# Altium PCB PCB-PDB.PcbDoc
Units mm, origin at the board's own origin, x right, y up, seen from the top; angles counter-clockwise.
Board outline 66 x 79 mm, 2 copper layers (Top Layer, Bottom Layer); 132 components, 46 nets, 320 pads, 68 vias.
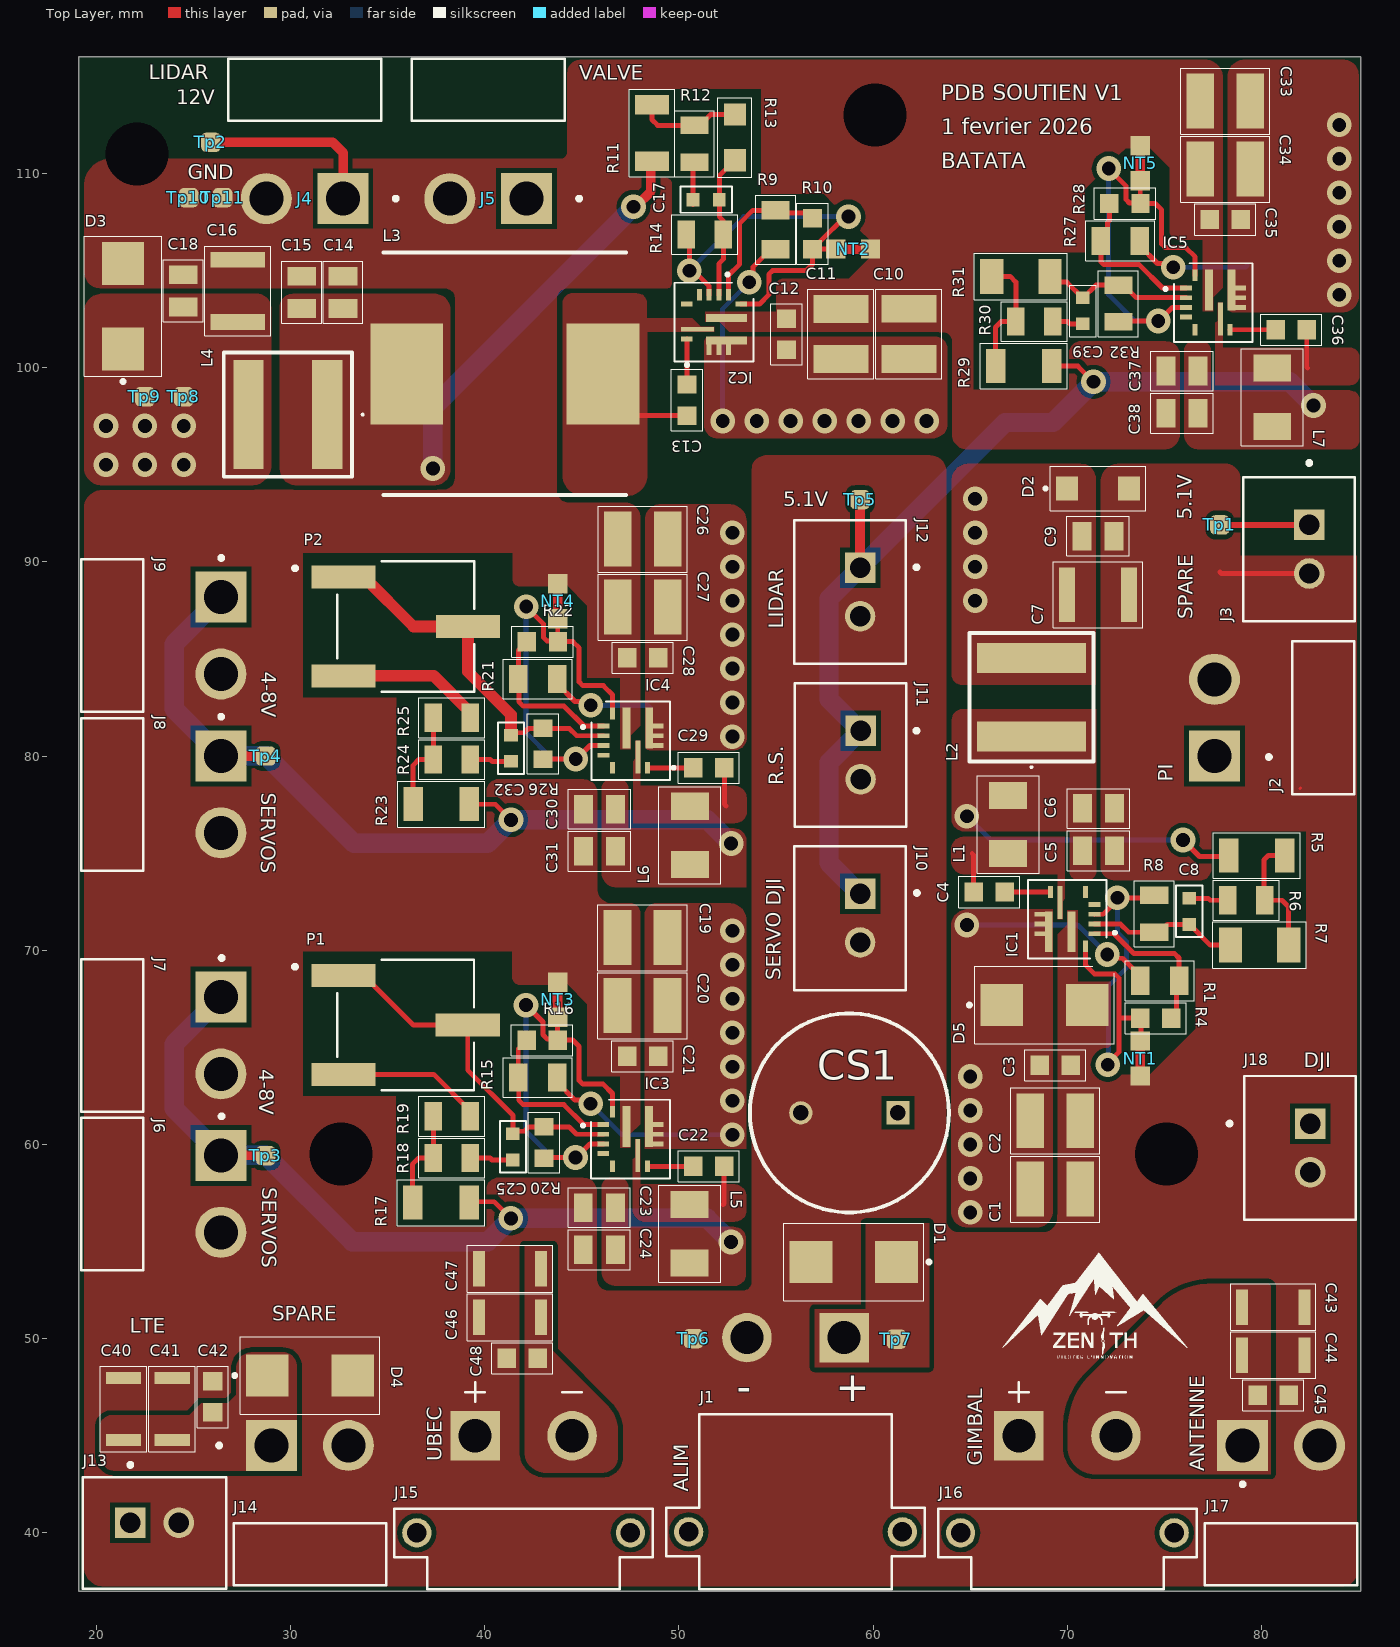
[diagram p0: Top Layer view]
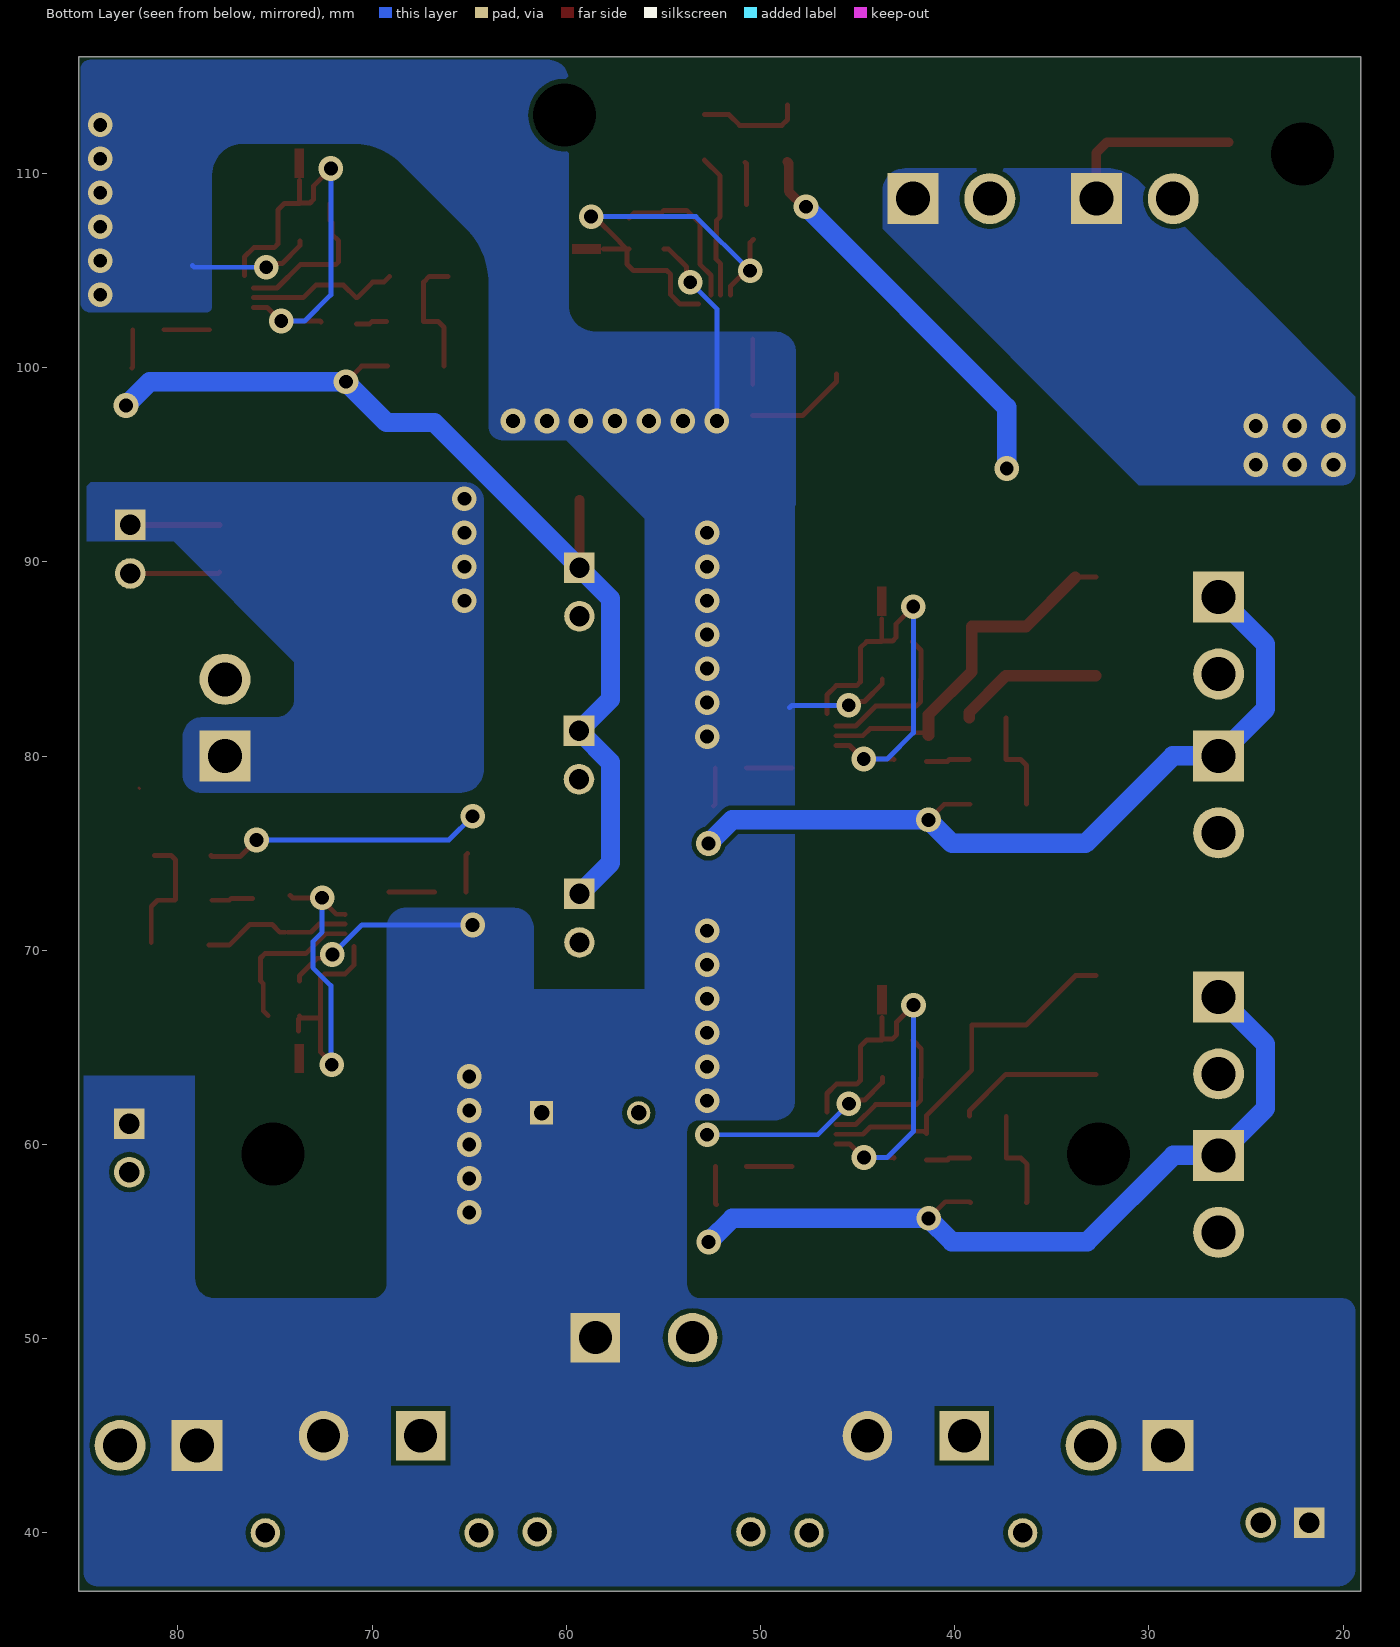
[diagram p1: Bottom Layer view, seen from below]
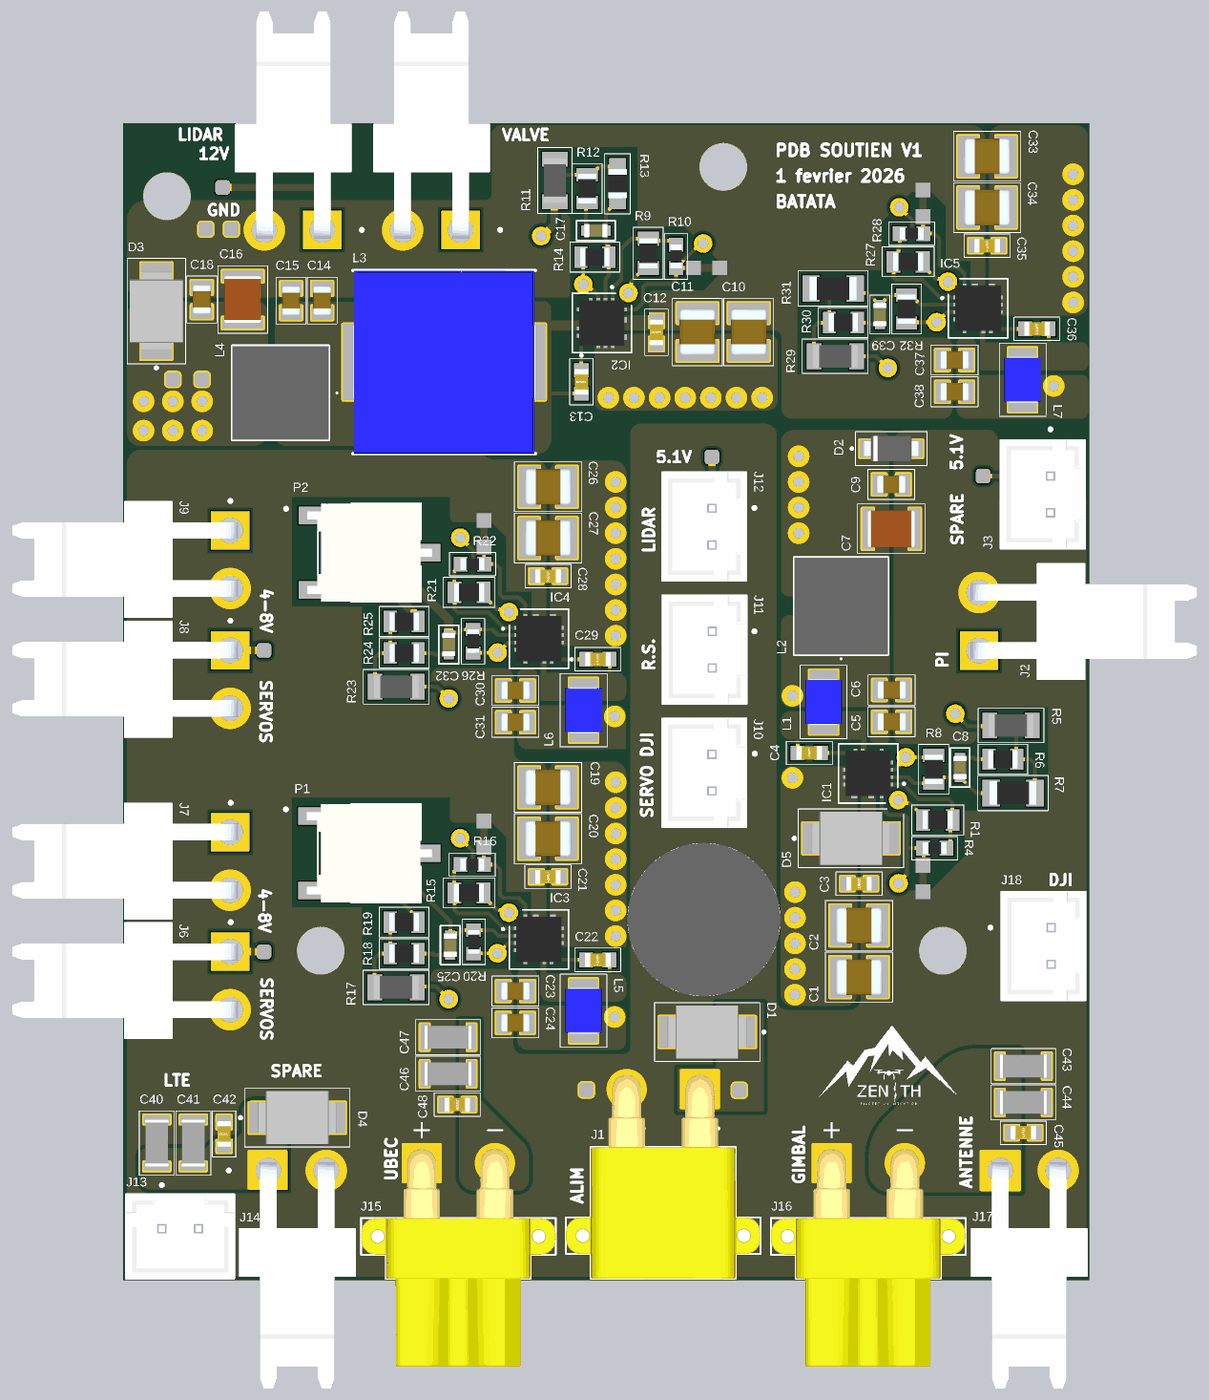
[diagram p2: 3D render of the assembled board from above, using the file's embedded part models]

## Layer stack, top to bottom
Top Solder: solder mask 0.0102, Solder Resist, Dk 3.5
Top Layer: signal copper 0.0356
Dielectric 1: dielectric 0.32, FR-4, Dk 4.8
Bottom Layer: signal copper 0.0356
Bottom Solder: solder mask 0.0102, Solder Resist, Dk 3.5

## Board outline
19.1,37 19.1,116 85.1,116 85.1,37

## Design rules (kind name [scope] priority, off if disabled: settings)
Clearance [All] p1: gap=0.244 ignorepadtopadclearanceinfootprint=TRUE except(0.254: SMDPad-THPad THPad-Via Via-Via)
PolygonConnect [All] p1: connectstyle=Direct reliefconductorwidth=0.254 reliefentries=4 polygonreliefangle="90 Angle" airgapwidth=0.254
RoutingVias [All] p1: holewidth=0.711 width=1.27 viastyle="Through Hole" minholewidth=0.711 minwidth=1.27 maxholewidth=0.711 maxwidth=1.27
SolderMaskExpansion [All] p1: expansion=0.102 istentingtop=FALSE
SupplyNets "Schematic Supply Nets_1" [InNet('PGND')] p1: voltage=0.000
SupplyNets "Schematic Supply Nets" [InNet('VCC')] p2: voltage=0.000
Width [All] p1: maxlimit=4 minlimit=0.15 preferedwidth=0.254 minimp=50.000000 maximp=50.000000 favimp=50.000000
30 further rules are at their usual default settings.

## Components (designator, comment, footprint, x,y, rotation, side; value= is the part's Value field where it differs from the comment)
C1 "10uF" CAPC3225X280N 69.375,57.7 r180 top
C2 "10uF" CAPC3225X280N 69.375,61.225 r180 top
C3 "0.1uF" C0603 69.375,64.075 r180 top
C4 "0.1uF" C0603 65.975,73 r180 top
C5 "22uF" CAPC2012X145N 71.6,75.125 r180 top
C6 "22uF" CAPC2012X145N 71.6,77.3 r180 top
C7 "1.5uF" CAPC3225X200N 71.575,88.3 r180 top
C8 "100pF" GRM1885C1H101JA01D 76.275,72 r270 top
C9 "22uF" CAPC2012X145N 71.575,91.325 r180 top
C10 "10uF" CAPC3225X280N 61.837,101.735 r270 top
C11 "10uF" CAPC3225X280N 58.336,101.731 r270 top
C12 "0.1uF" C0603 55.538,101.71 r270 top
C13 "0.1uF" C0603 50.411,98.331 r270 top
C14 "22uF" CAPC2012X145N 32.7,103.875 r270 top
C15 "22uF" CAPC2012X145N 30.575,103.875 r270 top
C16 "1.5uF" CAPC3225X200N 27.275,103.95 r270 top
C17 "100pF" GRM1885C1H101JA01D 51.4,108.65 r0 top
C18 "22uF" CAPC2012X145N 24.475,103.95 r270 top
C19 "10uF" CAPC3225X280N 48.125,70.65 r0 top
C20 "10uF" CAPC3225X280N 48.125,67.15 r0 top
C21 "0.1uF" C0603 48.125,64.55 r0 top
C22 "0.1uF" C0603 51.525,58.875 r0 top
C23 "22uF" CAPC2012X145N 45.9,56.75 r0 top
C24 "22uF" CAPC2012X145N 45.9,54.575 r0 top
C25 "100pF" GRM1885C1H101JA01D 41.45,59.875 r90 top
C26 "10uF" CAPC3225X280N 48.133,91.169 r0 top
C27 "10uF" CAPC3225X280N 48.133,87.669 r0 top
C28 "0.1uF" C0603 48.133,85.069 r0 top
C29 "0.1uF" C0603 51.533,79.394 r0 top
C30 "22uF" CAPC2012X145N 45.908,77.269 r0 top
C31 "22uF" CAPC2012X145N 45.908,75.094 r0 top
C32 "100pF" GRM1885C1H101JA01D 41.35,80.4 r90 top
C33 "10uF" CAPC3225X280N 78.125,113.725 r0 top
C34 "10uF" CAPC3225X280N 78.125,110.225 r0 top
C35 "0.1uF" C0603 78.125,107.625 r0 top
C36 "0.1uF" C0603 81.525,101.95 r0 top
C37 "22uF" CAPC2012X145N 75.9,99.825 r0 top
C38 "22uF" CAPC2012X145N 75.9,97.65 r0 top
C39 "100pF" GRM1885C1H101JA01D 70.8,102.925 r90 top
C40 "47uF 25V" CAPC3216X180N 21.4,46.375 r270 top
C41 "47uF 25V" CAPC3216X180N 23.9,46.375 r270 top
C42 "0.1uF" C0603 26,47 r270 top
C43 "47uF 25V" CAPC3216X180N 80.6,51.625 r180 top
C44 "47uF 25V" CAPC3216X180N 80.6,49.15 r180 top
C45 "0.1uF" C0603 80.6,47.075 r180 top
C46 "47uF 25V" CAPC3216X180N 41.3,51.1 r0 top
C47 "47uF 25V" CAPC3216X180N 41.3,53.6 r0 top
C48 "0.1uF" C0603 41.925,49 r0 top
CS1 "1000uF" CAPPRD500W60D1025H2150 61.275,61.625 r180 top
D1 "Diode" DIOM5436X244N 59,53.95 r180 top
D2 "SMF6.0A" SODFL3718X140N 71.575,93.775 r0 top
D3 "15V" DIOM5436X244N 21.375,103.158 r90 top
D4 "Diode" DIOM5436X244N 31,48.1 r0 top
D5 "Diode" DIOM5436X244N 68.825,67.175 r0 top
IC1 "TPS56637RPAR" TPS56637RPAR 69.995,71.6 r180 top
IC2 "TPS56637RPAR" TPS56637RPAR 51.802,102.345 r270 top
IC3 "TPS56637RPAR" TPS56637RPAR 47.505,60.275 r0 top
IC4 "TPS56637RPAR" TPS56637RPAR 47.513,80.794 r0 top
IC5 "TPS56637RPAR" TPS56637RPAR 77.505,103.35 r0 top
J1 "XT30PW-M" AMASS_XT30PW-M 56,40.05 r180 top
J2 "B2PS-VH_(LF)(SN)" JST_B2PS-VH_(LF)(SN) 77.575,81.97 r90 top
J3 "B2B-XH-A_(LF)(SN)" JST_B2B-XH-A_(LF)(SN) 81.925,90.65 r90 top
J4 "B2PS-VH_(LF)(SN)" JST_B2PS-VH_(LF)(SN) 30.73,108.701 r180 top
J5 "B2PS-VH_(LF)(SN)" JST_B2PS-VH_(LF)(SN) 40.178,108.701 r180 top
J6 "B2PS-VH_(LF)(SN)" JST_B2PS-VH_(LF)(SN) 26.416,57.456 r270 top
J7 "B2PS-VH_(LF)(SN)" JST_B2PS-VH_(LF)(SN) 26.416,65.61 r270 top
J8 "B2PS-VH_(LF)(SN)" JST_B2PS-VH_(LF)(SN) 26.416,78.026 r270 top
J9 "B2PS-VH_(LF)(SN)" JST_B2PS-VH_(LF)(SN) 26.416,86.205 r270 top
J10 "B2B-XH-A_(LF)(SN)" JST_B2B-XH-A_(LF)(SN) 58.8,71.65 r90 top
J11 "B2B-XH-A_(LF)(SN)" JST_B2B-XH-A_(LF)(SN) 58.825,80.05 r90 top
J12 "B2B-XH-A_(LF)(SN)" JST_B2B-XH-A_(LF)(SN) 58.8,88.45 r90 top
J13 "B2B-XH-A_(LF)(SN)" JST_B2B-XH-A_(LF)(SN) 23,40 r180 top
J14 "B2PS-VH_(LF)(SN)" JST_B2PS-VH_(LF)(SN) 31,44.5 r0 top
J15 "XT30PW-F" AMASS_XT30PW-F 42,40 r180 top
J16 "XT30PW-F" AMASS_XT30PW-F 70,40 r180 top
J17 "B2PS-VH_(LF)(SN)" JST_B2PS-VH_(LF)(SN) 81,44.5 r0 top
J18 "B2B-XH-A_(LF)(SN)" JST_B2B-XH-A_(LF)(SN) 81.975,59.825 r90 top
L1 "3.3uH" INDM3225X240N 66.95,76.475 r270 top
L2 "6.8uH" ASPIF60606R8MT 68.15,83.025 r90 top
L3 "5.6uH" INDPM125125X800N 41.036,99.681 r0 top
L4 "6.8uH" ASPIF60606R8MT 29.861,97.581 r180 top
L5 "3.3uH" INDM3225X240N 50.55,55.4 r90 top
L6 "3.3uH" INDM3225X240N 50.558,75.919 r90 top
L7 "3.3uH" INDM3225X240N 80.55,98.475 r90 top
NT1 "NetTie" NetTie 73.75,64.425 r270 top net-tie
NT2 "NetTie" NetTie 58.961,106.106 r0 top net-tie
NT3 "NetTie" NetTie 43.75,67.45 r90 top net-tie
NT4 "NetTie" NetTie 43.758,87.969 r90 top net-tie
NT5 "NetTie" NetTie 73.75,110.525 r90 top net-tie
P1 "50k" TRIM_3361P-1-503GLF 35.925,66.15 r0 top
P2 "50k" TRIM_3361P-1-503GLF 35.933,86.669 r0 top
R1 "169k" RESC2012X50N 74.75,68.425 r180 top
R4 "36.1k" RESC1608X51N 74.55,66.5 r0 top
R5 "49.9" RESC3016X65N 79.75,74.875 r180 top
R6 "20k" RESC2012X60N 79.2,72.575 r180 top
R7 "75k" RESC3216X75N 79.896,70.261 r0 top
R8 "10k" RESC2012X60N 74.475,71.875 r270 top
R9 "169k" RESC2012X50N 54.977,107.1 r270 top
R10 "36.1k" RESC1608X51N 56.875,106.9 r90 top
R11 "49.9" RESC3016X65N 48.602,112.075 r270 top
R12 "20k" RESC2012X60N 50.802,111.525 r270 top
R13 "191k" ERJ6ENF1000V 52.886,111.856 r90 top
R14 "10k" RESC2012X60N 51.325,106.85 r0 top
R15 "169k" RESC2012X50N 42.725,63.45 r0 top
R16 "36.1k" RESC1608X51N 42.95,65.375 r180 top
R17 "49.9" RESC3016X65N 37.75,57 r0 top
R18 "20k" RESC2012X60N 38.3,59.3 r0 top
R19 "42.7k" RESC2012X60N 38.3,61.45 r180 top
R20 "7.5k" RESC1608X55N 43.05,60.1 r90 top
R21 "169k" RESC2012X50N 42.733,83.969 r0 top
R22 "36.1k" RESC1608X51N 42.971,85.894 r180 top
R23 "49.9" RESC3016X65N 37.758,77.519 r0 top
R24 "20k" RESC2012X60N 38.308,79.819 r0 top
R25 "42.7k" RESC2012X60N 38.308,81.969 r180 top
R26 "7.5k" RESC1608X55N 43,80.625 r90 top
R27 "169k" RESC2012X50N 72.725,106.525 r0 top
R28 "36.1k" RESC1608X51N 72.963,108.45 r180 top
R29 "49.9" RESC3016X65N 67.75,100.075 r0 top
R30 "20k" RESC2012X60N 68.3,102.375 r0 top
R31 "75k" RESC3216X75N 67.6,104.7 r180 top
R32 "10k" RESC2012X60N 72.625,103.3 r90 top
Tp1 "Testpoint" Testpoint 77.85,91.9 r90 top
Tp2 "Testpoint" Testpoint 25.9,111.6 r90 top
Tp3 "Testpoint" Testpoint 28.725,59.425 r90 top
Tp4 "Testpoint" Testpoint 28.725,80 r90 top
Tp5 "Testpoint" Testpoint 59.325,93.2 r0 top
Tp6 "Testpoint" Testpoint 50.75,50 r90 top
Tp7 "Testpoint" Testpoint 61.2,49.975 r90 top
Tp8 "Testpoint" Testpoint 24.5,98.5 r90 top
Tp9 "Testpoint" Testpoint 22.5,98.5 r90 top
Tp10 "Testpoint" Testpoint 24.75,108.75 r90 top
Tp11 "Testpoint" Testpoint 26.5,108.75 r90 top

## Footprints (in the part's own frame and the unit in brackets; to place one, negate y for a bottom-side part, rotate by r counter-clockwise, add the part's x,y. Pads: shape width x height; smd on the part's side, far side on the other; paste and mask are expansions set on the pad)
AMASS_XT30PW-F [mm]
  round 2.55 hole 1.7: N(-2.5,-5)
  rect 2.55x2.55 / inner round 2.55 / far side rect 2.55x2.55 hole 1.7: P(2.5,-5)
  round 1.508 hole 1: S1(5.5,0) S2(-5.5,0)
  silkscreen extent -6.65,-7.75 6.65,2.9, body extent -6.65,-6 6.65,8.9, height 5
AMASS_XT30PW-M [mm]
  round 2.55 hole 1.7: N(2.5,-10)
  rect 2.55x2.55 / inner round 2.55 / far side rect 2.55x2.55 hole 1.7: P(-2.5,-10)
  round 1.508 hole 1: S1(5.5,0) S2(-5.5,0)
  silkscreen extent -6.65,-6.05 6.65,2.95, body extent -6.65,-11 6.65,2.95, height 5
ASPIF60606R8MT [mm]
  rect 1.55x5.6 smd: 1(-2.025,0) 2(2.025,0)
  silkscreen extent -3.65,-3.2 3.3,3.2, body extent -3.3,-3.2 3.3,3.2, height 6.1
C0603 [mm]
  rect 0.95x1 smd: 1(-0.8,0) 2(0.8,0)
  silkscreen extent -1.58,-0.8 1.58,0.8, body extent -0.87,-0.48 0.88,0.47, height 0.87
CAPC2012X145N [mm]
  rect 0.97x1.47 smd: 1(-0.83,0) 2(0.83,0)
  silkscreen extent -1.6,-1.02 1.6,1.02, body extent -1,-0.63 1,0.63, height 1.45
CAPC3216X180N [mm]
  rect 0.62x1.82 smd: 1(-1.6,0) 2(1.6,0)
  silkscreen extent -2.2,-1.2 2.2,1.2, body extent -1.6,-0.8 1.6,0.8, height 1.6
CAPC3225X200N [mm]
  rect 0.81x2.82 smd: 1(-1.6,0) 2(1.6,0)
  silkscreen extent -2.3,-1.7 2.3,1.7, body extent -1.6,-1.25 1.6,1.25, height 2.5
CAPC3225X280N [mm]
  rect 1.43x2.82 smd: 1(-1.29,0) 2(1.29,0)
  silkscreen extent -2.3,-1.7 2.3,1.7, body extent -1.6,-1.25 1.6,1.25, height 2.8
CAPPRD500W60D1025H2150 [mm]
  rect 1.2x1.2 hole 0.8: 1(0,0)
  round 1.2 hole 0.8: 2(5,0)
  silkscreen extent -2.63,-5.12 7.63,5.12, body extent -2.75,-5.24 7.75,5.24, height 21.5
DIOM5436X244N [mm]
  rect 2.2x2.15 smd: 1(-2.2,0) 2(2.2,0)
  silkscreen extent -3.93,-2 3.6,2, body extent -2.7,-1.81 2.7,1.81, height 2.31
ERJ6ENF1000V [mm]
  rect 1.15x1.15 smd: 1(-1.175,0) 2(1.175,0)
  silkscreen extent -2.06,-0.86 2.04,0.89, body extent -1,-0.63 1,0.63, height 0.6
GRM1885C1H101JA01D [mm]
  rect 0.65x0.7 smd: 1(-0.675,0) 2(0.675,0)
  silkscreen extent -1.33,-0.67 1.33,0.67, body extent -0.8,-0.45 0.8,0.45, height 0.8
INDM3225X240N [mm]
  rect 1.4x1.95 smd: 1(-1.5,0) 2(1.5,0)
  silkscreen extent -2.5,-1.6 2.5,1.6, body extent -1.6,-1.25 1.6,1.25, height 2.4
INDPM125125X800N [mm]
  rect 3.75x5.2 smd: 1(-5.05,0) 2(5.05,0)
  silkscreen extent -6.25,-6.25 6.25,6.25, body extent -6.25,-6.25 6.25,6.25, height 8
JST_B2B-XH-A_(LF)(SN) [mm]
  rect 1.575x1.575 / inner round 1.575 / far side rect 1.575x1.575 hole 1.05: 1(1.25,-0.525)
  round 1.575 hole 1.05: 2(-1.25,-0.525)
  silkscreen extent -3.7,-2.88 4.54,2.88, body extent -3.7,-2.88 3.7,2.88, height 7
JST_B2PS-VH_(LF)(SN) [mm]
  rect 2.625x2.625 / inner round 2.625 / far side rect 2.625x2.625 hole 1.75: 1(-1.98,0)
  round 2.625 hole 1.75: 2(1.98,0)
  silkscreen extent -3.93,-7.2 3.93,-2.7, body extent -3.93,-14.9 3.93,0.57, height 8.5
NetTie [mm]
  rect 1x1 smd mask-10: 1(-0.9,0) 2(0.9,0)
  Top Layer region: -0.75,-0.249 0.75,-0.249 0.75,0.251 -0.75,0.251
RESC1608X51N [mm]
  rect 0.95x1 smd: 1(-0.8,0) 2(0.8,0)
  silkscreen extent -1.58,-0.8 1.58,0.8, body extent -0.81,-0.41 0.81,0.41, height 0.51
RESC1608X55N [mm]
  rect 0.9x1 smd: 1(-0.8,0) 2(0.8,0)
  silkscreen extent -1.55,-0.8 1.55,0.8, body extent -0.8,-0.4 0.8,0.4, height 0.45
RESC2012X50N [mm]
  rect 0.95x1.45 smd: 1(-1,0) 2(1,0)
  silkscreen extent -1.78,-1.02 1.78,1.02, body extent -1.02,-0.63 1.02,0.63, height 0.5
RESC2012X60N [mm]
  rect 0.9x1.45 smd: 1(-0.95,0) 2(0.95,0)
  silkscreen extent -1.7,-1.02 1.7,1.02, body extent -1,-0.63 1,0.63, height 0.6
RESC3016X65N [mm]
  rect 1x1.75 smd: 1(-1.45,0) 2(1.45,0)
  silkscreen extent -2.25,-1.17 2.25,1.17, body extent -1.52,-0.78 1.53,0.77, height 0.55
RESC3216X75N [mm]
  rect 1.2x1.8 smd: 1(-1.5,0) 2(1.5,0)
  silkscreen extent -2.4,-1.2 2.4,1.2, body extent -1.6,-0.8 1.6,0.8, height 0.75
SODFL3718X140N [mm]
  rect 1.12x1.22 smd: 1(-1.6,0) 2(1.6,0)
  silkscreen extent -2.72,-1.15 2.45,1.15, body extent -1.85,-0.9 1.85,0.9, height 1.4
Testpoint [mm]
  rrect50% 1x1 smd: TP(0,0)
TPS56637RPAR [mm]
  rect 0.6x0.25 smd mask+0: 1(-1.4,0.75) 2(-1.4,0.25) 3(-1.4,-0.25) 4(-1.4,-0.75)
  rect 0.25x0.6 smd mask+0: 5(-0.93,-1.4) 7(0.87,-1.4) 10(-0.93,1.4)
  rect 0.25x1.7 smd mask+0: 6(0.37,-0.85)
  rect 0.4x2.1 smd mask+0: 8(0.95,0.65) 9(-0.21,0.65)
  rect 0.56x0.25 smd mask+0: 11(1.42,-0.25) 12(1.42,0.25) 13(1.42,0.75)
  silkscreen extent -2.5,-2.02 2.02,2.02, body extent -1.55,-1.55 1.55,1.55, height 1
TRIM_3361P-1-503GLF [mm]
  rect 3.3x1.19 smd: 1(-3.2,2.54) 2(3.2,0) 3(-3.2,-2.54)
  silkscreen extent -5.8,-3.35 3.52,3.35, body extent -4.27,-3.35 4.27,3.35, height 5.84

## Part data
C1 C2 C10 C11 C19 C20 C26 C27 C33 C34: library part AGC1210X7R500-106KNE, "Capacitor", Manufacturer_Name=Venkel, Datasheet Link=https://data.venkel.com/documents/agc-series?force=1, Height=2.8mm, Manufacturer_Part_Number=AGC1210X7R500-106KNE
C3 C4 C12 C13 C21 C22 C28 C29 C35 C36 C42 C45 C48: library part C0603C104K5RACTU, "Capacitor", Manufacturer_Name=KEMET, Mouser Part Number=80-C0603C104K5R, Arrow Part Number=C0603C104K5RACTU, Arrow Price/Stock=https://www.arrow.com/en/products/c0603c104k5ractu/kemet-corporation?utm_currency=USD&region=nac, Datasheet Link=https://content.kemet.com/datasheets/KEM_C1002_X7R_SMD.pdf, Height=0.87mm, Manufacturer_Part_Number=C0603C104K5RACTU, Mouser Price/Stock=https://www.mouser.co.uk/ProductDetail/KEMET/C0603C104K5RACTU?qs=l5k%252BbMnNDkkVcnZPSAaaiQ%3D%3D
C5 C6 C9 C14 C15 C18 C23 C24 C30 C31 C37 C38: library part C2012X5R1V226M125AC, "Capacitor, 35V", Manufacturer_Name=TDK, Mouser Part Number=810-C2012X5R1V226MAC, Arrow Part Number=C2012X5R1V226M125AC, Arrow Price/Stock=https://www.arrow.com/en/products/c2012x5r1v226m125ac/tdk?utm_currency=USD&region=nac, Datasheet Link=https://product.tdk.com/info/en/catalog/datasheets/mlcc_commercial_midvoltage_en.pdf, Height=1.45mm, Manufacturer_Part_Number=C2012X5R1V226M125AC, Mouser Price/Stock=https://www.mouser.co.uk/ProductDetail/TDK/C2012X5R1V226M125AC?qs=6JAMGB%252BEdkyUk0d2Mu2IrQ%3D%3D
C7 C16: library part C3225X7R2A155K200AB, "Capacitor", Manufacturer_Name=TDK, Mouser Part Number=810-C3225X7R2A155K2B, Arrow Part Number=C3225X7R2A155K200AB, Arrow Price/Stock=https://www.arrow.com/en/products/c3225x7r2a155k200ab/tdk, Datasheet Link=https://product.tdk.com/info/en/catalog/datasheets/mlcc_commercial_midvoltage_en.pdf, Height=2mm, Manufacturer_Part_Number=C3225X7R2A155K200AB, Mouser Price/Stock=https://www.mouser.co.uk/ProductDetail/TDK/C3225X7R2A155K200AB?qs=xLDY6iXSiQYhBLhobQfC5A%3D%3D
C8 C17 C25 C32 C39: library part GRM1885C1H101JA01D, "Capacitor", Manufacturer_Name="Murata Electronics", Mouser Part Number=81-GRM39C101J50, Arrow Part Number=GRM1885C1H101JA01D, Arrow Price/Stock=https://www.arrow.com/en/products/grm1885c1h101ja01d/murata-manufacturing?utm_currency=USD&region=europe, Datasheet Link=https://search.murata.co.jp/Ceramy/image/img/A01X/G101/ENG/GRM1885C1H101JA01-01A.pdf, Height=0.9mm, Manufacturer_Part_Number=GRM1885C1H101JA01D, Mouser Price/Stock=https://www.mouser.co.uk/ProductDetail/Murata-Electronics/GRM1885C1H101JA01D?qs=H3lwsW1hsDt1I4guwPQ00A%3D%3D
C40 C41 C43 C44 C46 C47: library part C3216X5R1E476M160AC, "Capacitor 47 uF", Manufacturer_Name=TDK, Manufacturer_Part_Number=C3216X5R1E476M160AC., Mouser Part Number=N/A, Datasheet Link=https://media.digikey.com/pdf/Data%20Sheets/TDK%20PDFs/mlcc_commercial_general_Rev2018.pdf, Height=1.8mm, Mouser Price/Stock=https://www.mouser.com/Search/Refine.aspx?Keyword=N%2FA
CS1: library part 35PX1000MEFC10X20, "Capacitor Polarised", Manufacturer_Name=Rubycon, Mouser Part Number=232-35PX1000MEFC10X2, Arrow Part Number=35PX1000MEFC10X20, Arrow Price/Stock=https://www.arrow.com/en/products/35px1000mefc10x20/rubycon?region=nac, Datasheet Link=https://www.rubycon.co.jp/wp-content/uploads/catalog-aluminum/PX.pdf, Height=21.5mm, Manufacturer_Part_Number=35PX1000MEFC10X20, Mouser Price/Stock=https://www.mouser.co.uk/ProductDetail/Rubycon/35PX1000MEFC10X20?qs=T3oQrply3y86%2F1qnNfO%252BAA%3D%3D
D1 D4 D5: library part SMBJ26A, "TVS Diode (Uni-directional)", Manufacturer_Name=Bourns, Mouser Part Number=652-SMBJ26A, Arrow Part Number=SMBJ26A, Arrow Price/Stock=https://www.arrow.com/en/products/smbj26a/bourns?utm_currency=USD&region=nac, Datasheet Link=https://www.bourns.com/docs/product-datasheets/smbj.pdf?sfvrsn=34552159_17, Height=2.44mm, Manufacturer_Part_Number=SMBJ26A, Mouser Price/Stock=https://www.mouser.co.uk/ProductDetail/Bourns/SMBJ26A?qs=%252Bf8Cd6aE5bzyuNXx4QjGJA%3D%3D
D2: "TVS Diode (Uni-directional)", Manufacturer_Name=Diotec, Mouser Part Number=637-SMF6.0A, Arrow Part Number=SMF6.0A, Arrow Price/Stock=https://www.arrow.com/en/products/smf6.0a/diotec-semiconductor-ag?utm_currency=USD&region=nac, Datasheet Link=https://www.mouser.cn/ProductDetail/Diotec-Semiconductor/SMF6.0A?qs=OlC7AqGiEDnWjoz6bXl5LA%3D%3D, Height=1.4mm, Manufacturer_Part_Number=SMF6.0A, Mouser Price/Stock=https://www.mouser.co.uk/ProductDetail/Diotec-Semiconductor/SMF6.0A?qs=OlC7AqGiEDnWjoz6bXl5LA%3D%3D
D3: library part SMBJ15A, "TVS Diode (Uni-directional)", Manufacturer_Name=Vishay, Mouser Part Number=78-SMBJ15A, Datasheet Link=http://www.vishay.com/docs/88392/smbj.pdf, Height=2.44mm, Manufacturer_Part_Number=SMBJ15A, Mouser Price/Stock=https://www.mouser.co.uk/ProductDetail/Vishay-General-Semiconductor/SMBJ15A?qs=%252BA9HMDDz5KavBY56EO7ceQ%3D%3D
IC1 IC2 IC3 IC4 IC5: "Integrated Circuit", Manufacturer_Name="Texas Instruments", Mouser Part Number=595-TPS56637RPAR, Arrow Part Number=TPS56637RPAR, Arrow Price/Stock=https://www.arrow.com/en/products/tps56637rpar/texas-instruments?utm_currency=USD&region=nac, Datasheet Link=https://www.ti.com/lit/gpn/TPS56637, Height=1mm, Manufacturer_Part_Number=TPS56637RPAR, Mouser Price/Stock=https://www.mouser.co.uk/ProductDetail/Texas-Instruments/TPS56637RPAR?qs=9r4v7xj2LnkQ0Y9HL0qmSA%3D%3D
J1: "Socket; DC supply; XT30; male; PIN: 2; on PCBs; THT; Colour: yellow", Package=None, Check_prices=https://www.snapeda.com/parts/XT30PW-M/AMASS/view-part/?ref=eda, MF=AMASS, MP=XT30PW-M, SnapEDA_Link=https://www.snapeda.com/parts/XT30PW-M/AMASS/view-part/?ref=snap
J2 J4 J5 J6 J7 J8 J9 J14 J17: "Connector Header Through Hole, Right Angle 2 position 0.156 (3.96mm)", Package=None, Check_prices=https://www.snapeda.com/parts/B2PS-VH%20(LF)(SN)/JST/view-part/?ref=eda, MF=JST, MP="B2PS-VH (LF)(SN)", SnapEDA_Link=https://www.snapeda.com/parts/B2PS-VH%20(LF)(SN)/JST/view-part/?ref=snap
J3 J10 J11 J12 J13 J18: "Connector Header Through Hole 2 position 0.098 (2.50mm)", Package=None, Check_prices=https://www.snapeda.com/parts/B2B-XH-A%20(LF)(SN)/JST+Sales+America+Inc./view-part/?ref=eda, MF="JST Sales", MP="B2B-XH-A (LF)(SN)", SnapEDA_Link=https://www.snapeda.com/parts/B2B-XH-A%20(LF)(SN)/JST+Sales+America+Inc./view-part/?ref=snap
J15 J16: "Socket; DC supply; XT30; female; PIN: 2; on PCBs; THT; yellow; 15A", Package=None, Check_prices=https://www.snapeda.com/parts/XT30PW-F/AMASS/view-part/?ref=eda, MF=amass, MP=XT30PW-F, SnapEDA_Link=https://www.snapeda.com/parts/XT30PW-F/AMASS/view-part/?ref=snap
L1 L5 L6 L7: library part NLV32T-3R3J-EF, "Inductor", Manufacturer_Name=TDK, Datasheet Link=https://product.tdk.com/system/files/dam/doc/product/inductor/inductor/smd/catalog/inductor_commercial_standard_nlv32-ef_en.pdf, Height=2.4mm, Manufacturer_Part_Number=NLV32T-3R3J-EF
L2 L4: library part ASPI-F6060-6R8M-T, "Inductor", Manufacturer_Name=ABRACON, Datasheet Link=https://abracon.com/datasheets/ASPI-F6060.pdf, Height=6mm, Manufacturer_Part_Number=ASPI-F6060-6R8M-T
L3: library part SRR1280-5R6Y, "Inductor", Manufacturer_Name=Bourns, Mouser Part Number=652-SRR1280-5R6Y, Datasheet Link=https://docs.rs-online.com/c0b9/0900766b80ddd400.pdf, Height=8mm, Manufacturer_Part_Number=SRR1280-5R6Y, Mouser Price/Stock=https://www.mouser.co.uk/ProductDetail/Bourns/SRR1280-5R6Y?qs=brMhP%2FMjUffYaqEo5zomkw%3D%3D
NT1 NT2 NT3 NT4 NT5: "Net Tie"
P1 P2: library part TRIM_3361P-1-503GLF, "Potentiometer 50k ohms", ComponentLink1Description="Manufacturer Link", ComponentLink1URL=https://www.digikey.ca/en/products/detail/bourns-inc/3361P-1-503GLF/1088375
R1 R9 R15 R21 R27: library part CRCW08051K96FKEA, "Resistor", Manufacturer_Name=Vishay, Mouser Part Number=71-CRCW08051K96FKEA, Arrow Part Number=CRCW08051K96FKEA, Arrow Price/Stock=https://www.arrow.com/en/products/crcw08051k96fkea/vishay?region=nac, Datasheet Link=http://www.vishay.com/docs/20035/dcrcwe3.pdf, Height=0.5mm, Manufacturer_Part_Number=CRCW08051K96FKEA, Mouser Price/Stock=https://www.mouser.co.uk/ProductDetail/Vishay-Dale/CRCW08051K96FKEA?qs=1CkV0QOCgMpA%2F6GTgXIN%2Fg%3D%3D
R4 R10 R16 R22 R28: library part PTN0603E3612BST1, "Resistor", Manufacturer_Name=Vishay, Datasheet Link=http://www.vishay.com/docs/60026/ptn.pdf, Height=0.508mm, Manufacturer_Part_Number=PTN0603E3612BST1
R5 R11 R17 R23 R29: library part RNCF1206TKY49R9, "Resistor", Manufacturer_Name="Stackpole Electronics", Mouser Part Number=708-RNCF1206TKY49R9, Arrow Part Number=RNCF1206TKY49R9, Arrow Price/Stock=https://www.arrow.com/en/products/rncf1206tky49r9/stackpole-electronics?region=nac, Datasheet Link=https://www.seielect.com/catalog/sei-rncf.pdf, Height=0.65mm, Manufacturer_Part_Number=RNCF1206TKY49R9, Mouser Price/Stock=https://www.mouser.co.uk/ProductDetail/SEI-Stackpole/RNCF1206TKY49R9?qs=IPgv5n7u5QbrkyDMq71eTQ%3D%3D
R6 R12 R18 R24 R30: library part RK73H2ATTD2002F, "Resistor", Manufacturer_Name="KOA Speer", Mouser Part Number=660-RK73H2ATTD2002F, Datasheet Link=http://www.koaspeer.com/catimages/Products/RK73H/RK73H.pdf, Height=0.6mm, Manufacturer_Part_Number=RK73H2ATTD2002F, Mouser Price/Stock=https://www.mouser.com/Search/Refine.aspx?Keyword=660-RK73H2ATTD2002F
R7 R31: library part CR1206-FX-7502ELF, "Resistor", Manufacturer_Name=Bourns, Mouser Part Number=652-CR1206FX-7502ELF, Datasheet Link=http://www.bourns.com/data/global/pdfs/CHPREZTR.pdf, Height=0.75mm, Manufacturer_Part_Number=CR1206-FX-7502ELF, Mouser Price/Stock=https://www.mouser.co.uk/ProductDetail/Bourns/CR1206-FX-7502ELF?qs=x5wsLs3ZZ83CFlrcVX0CWw%3D%3D
R8 R14 R32: library part CRCW080510K0FKEAHP, "Resistor", Manufacturer_Name=Vishay, Mouser Part Number=71-CRCW080510K0FKEAH, Arrow Part Number=CRCW080510K0FKEAHP, Arrow Price/Stock=https://www.arrow.com/en/products/crcw080510k0fkeahp/vishay?utm_currency=USD&region=europe, ClassName=PowerModul, Datasheet Link=https://componentsearchengine.com/Datasheets/1/CRCW08051R00FKEAHP.pdf, Height=0.6mm, Manufacturer_Part_Number=CRCW080510K0FKEAHP, Mouser Price/Stock=https://www.mouser.co.uk/ProductDetail/Vishay-Dale/CRCW080510K0FKEAHP?qs=FlFvgi4rxBybVOW6oiRQjA%3D%3D
R13: library part ERJ-6ENF1913V, "Resistor", Manufacturer_Name=Panasonic, Mouser Part Number=667-ERJ-6ENF1913V, Arrow Part Number=ERJ-6ENF1913V, Arrow Price/Stock=https://www.arrow.com/en/products/erj-6enf1913v/panasonic, Datasheet Link=https://industrial.panasonic.com/cdbs/www-data/pdf/RDA0000/AOA0000C84.pdf, Height=0.7mm, Manufacturer_Part_Number=ERJ-6ENF1913V, Mouser Price/Stock=https://www.mouser.com/Search/Refine.aspx?Keyword=667-ERJ-6ENF1913V
R19 R25: library part RN73R2ATTD4272D25, Package=None, Availability=Unavailable, MP=RN73R2ATTD4272D25, Price=None
R20 R26: library part RC0603FR-077K5L, "Resistor", Manufacturer_Name=KEMET, Mouser Part Number=603-RC0603FR-077K5L, Datasheet Link=http://www.yageo.com/documents/recent/PYu-RC0603_51_RoHS_L_v5.pdf, Height=0.55mm, Manufacturer_Part_Number=RC0603FR-077K5L, Mouser Price/Stock=https://www.mouser.co.uk/ProductDetail/Yageo/RC0603FR-077K5L/?qs=2cAdsCoAWREF%252BylA0TXaCQ%3D%3D

## Free pads (board coordinates)
  round 1.524 hole 3.25: 7(22.1,111) 7(32.6,59.5) 7(60.1,113) 7(75.1,59.5)

## Via types
v1: diameter 1.27, hole 0.711, Top Layer to Bottom Layer, 68 vias

## Nets (pads, with @x,y where several pads share a name; then routed paths per layer and width w, separated by ;. In a path a pad name is that pad's centre, name@x,y a point inside that pad or via, vN(x,y) a via of type N, cw(c..) or ccw(c..) an arc to the next point about the centre after c; other vN are vias at no path point)
AGND: IC1.3 IC1.10 NT1.1 R4.1 R8.1 | length 22
  Top Layer w0.254: IC1.10 70.925,69.25 71.404,68.771 72.455,68.771 72.65,68.576 72.65,66.475 ; IC1.3 71.397,71.852 71.847,71.852 72.575,72.58 v1(72.575,72.7) 74.1,72.7 R8.1@74.225,72.825 ; v1(72.075,64.1) 72.075,64.176 72.65,64.751 72.65,66.475 ; R4.1 73.8,66.45 73.8,65.85 ; R4.1@73.75,66.625 73.625,66.5 72.675,66.5 72.65,66.475
  Bottom Layer w0.254: v1(72.075,64.1) 72.125,64.15 72.125,68.175 73.054,69.104 73.054,70.446 72.575,70.925 v1(72.575,72.7)
AGND2: IC2.3 IC2.10 NT2.1 R10.1 R14.1 | length 22.5
  Top Layer w0.254: R14.1@50.361,106.608 50.536,106.433 v1(50.536,104.983) 50.763,104.983 51.55,104.197 51.55,103.747 IC2.3 ; IC2.10 54.152,103.275 54.631,103.754 54.631,104.805 54.826,105 56.55,105 56.875,105.325 R10.1 56.9,106.1 57.248,106.448 57.248,106.473 58.55,107.775 v1(58.725,107.775) ; R10.1@56.777,106.1 NT2.1@58.077,106.1
  Bottom Layer w0.254: v1(50.536,104.983) 53.328,107.775 v1@58.627,107.775
AGND3: IC3.3 IC3.10 NT3.1 R16.1 R20.1 | length 22.8
  Top Layer w0.254: v1(42.125,67.175) 42.996,66.304 42.996,65.654 43.225,65.425 43.7,65.425 R16.1 ; R20.1@43.125,59.3 43.15,59.325 v1(44.675,59.325) 44.712,59.325 45.412,60.025 IC3.3 ; NT3.1 R16.1 ; IC3.10 46.575,62.625 46.096,63.104 45.045,63.104 44.85,63.299 44.85,65.05 44.525,65.375 R16.1
  Bottom Layer w0.254: v1(42.125,67.175) 42.125,60.675 43.475,59.325 v1(44.675,59.325)
AGND4: IC4.3 IC4.10 NT4.1 R22.1 R26.1 | length 22.8
  Top Layer w0.254: v1(42.133,87.694) 43.017,86.81 43.017,86.11 43.208,85.919 43.746,85.919 R22.1 ; R26.1@43.133,79.819 43.158,79.844 v1(44.683,79.844) 44.72,79.844 45.42,80.544 IC4.3 ; NT4.1 43.758,85.894 44.533,85.894 44.858,85.569 44.858,83.817 45.053,83.623 46.104,83.623 46.583,83.144 IC4.10
  Bottom Layer w0.254: v1(42.133,87.694) 42.133,81.194 43.483,79.844 v1(44.683,79.844)
AGND5: IC5.3 IC5.10 NT5.1 R28.1 R32.1 | length 23.3
  Top Layer w0.254: v1(72.125,110.25) 73.009,109.366 73.009,108.666 73.2,108.475 73.738,108.475 R28.1 ; R32.1 72.675,102.4 v1(74.675,102.4) 74.712,102.4 75.412,103.1 IC5.3 ; NT5.1 73.75,108.45 74.525,108.45 74.85,108.125 74.85,106.374 75.045,106.179 76.096,106.179 76.575,105.7 IC5.10
  Bottom Layer w0.254: v1(72.125,110.25) 72.125,103.75 73.475,102.4 v1(74.675,102.4)
NetC4_1: C4.1 IC1.7 | length 2.3
  Top Layer w0.254: C4.1 IC1.7
NetC4_2: C4.2 IC1.6 L1.2 | length 2
  Top Layer w0.254: 65.1,74.975 65.175,74.9 C4.2
NetC5_2: C5.2 C6.2 L1.1 L2.1 R5.2 | length 14.4
  Top Layer w0.254: v1(75.95,75.675) 76.8,74.825 78.25,74.825 R5.2
  Bottom Layer w0.254: v1(64.825,76.9) 66.05,75.675 v1(75.95,75.675)
NetC7_2: C7.2 C9.2 D2.1 J2.1 J3.1 L2.2 Tp1.TP | length 4.6
  Top Layer w0.3: Tp1.TP J3.1
  other v1: 65.25,88 65.25,89.75 65.25,91.5 65.25,93.25
NetC8_1: C8.1 R6.2 | length 2.1
  Top Layer w0.254: C8.1@76.15,72.675 77.25,72.675 77.35,72.575 R6.2
NetC8_2: C8.2 IC1.2 R7.1 R8.2 | length 7.6
  Top Layer w0.254: IC1.2 72.725,71.35 73.15,70.925 R8.2@74.325,70.925 ; R8.2 74.75,70.925 75.15,71.325 C8.2 ; C8.2@76.3,71.325 77.364,70.261 R7.1
NetC13_1: C13.1 IC2.7 | length 2.3
  Top Layer w0.254: C13.1@50.402,99.131 IC2.7
NetC13_2: C13.2 IC2.6 L3.2 | length 5.5
  Top Layer w0.254: L3.2 46.086,99.279 47.834,97.531 C13.2
NetC14_2: C14.2 C15.2 L3.1 L4.1 R11.2 | length 20.5
  Top Layer w0.5: v1(47.661,108.283) 47.761,108.283 48.552,109.074 48.552,110.525 R11.2@48.627,110.6
  Bottom Layer w1: v1(37.326,94.801) 37.326,97.948 v1(47.661,108.283)
NetC16_2: C16.2 C18.2 D3.1 J4.1 J5.1 L4.2 Tp2.TP Tp8.TP Tp9.TP | length 9.4
  Top Layer w0.5: Tp2.TP 32.175,111.6 32.71,111.065 J4.1
  other v1: 20.5,95 22.5,95 24.5,95 20.5,97 22.5,97 24.5,97
NetC17_1: C17.1 R12.2 | length 2.2
  Top Layer w0.254: C17.1@50.727,108.4 50.727,110.5 R12.2
NetC17_2: C17.2 IC2.2 R13.1 R14.2 | length 7.5
  Top Layer w0.254: IC2.2 52.052,105.349 52.286,105.583 52.286,106.583 52.261,106.608 52.261,107.583 52.077,107.768 52.077,108.4 52.077,109.871 R13.1
NetC22_1: C22.1 IC3.7 | length 2.3
  Top Layer w0.254: IC3.7 C22.1
NetC22_2: C22.2 IC3.6 L5.2 | length 2
  Top Layer w0.254: 52.275,56.9 52.325,56.95 C22.2
NetC23_2: C23.2 C24.2 J6.1 J7.1 L5.1 R17.2 Tp3.TP | length 44.1
  Top Layer w0.254: R17.2 39.25,57.05 40.489,57.05 v1(41.346,56.194)
  Top Layer w0.5: J6.1 Tp3.TP@28.725,59.436
  Bottom Layer w1: J7.1 24,65.174 24,61.852 J6.1 28.739,59.436 33.175,55 40.152,55 v1(41.346,56.194) 51.456,56.194 v1(52.675,54.975)
NetC25_1: C25.1 R18.2 | length 2.2
  Top Layer w0.254: R18.2 40.275,59.3 40.375,59.2 C25.1
NetC25_2: C25.2 IC3.2 P1.1 P1.2 R20.2 | length 19
  Top Layer w0.254: P1.1 33.78,68.69 36.32,66.15 P1.2 39.125,63.825 41.45,61.5 C25.2 41.581,60.681 42.025,60.681 42.244,60.9 43.125,60.9 44.35,60.9 44.725,60.525 IC3.2
NetC29_1: C29.1 IC4.7 | length 2.3
  Top Layer w0.254: IC4.7 C29.1
NetC29_2: C29.2 IC4.6 L6.2 | length 2
  Top Layer w0.254: C29.2 52.333,77.519 52.433,77.419
NetC30_2: C30.2 C31.2 J8.1 J9.1 L6.1 R23.2 Tp4.TP | length 44.1
  Top Layer w0.254: R23.2 40.548,77.519 v1(41.354,76.712)
  Top Layer w0.5: J8.1 Tp4.TP@28.725,80.006
  Bottom Layer w1: J9.1 24,85.769 24,82.422 J8.1 28.769,80.006 33.275,75.5 40.142,75.5 v1(41.354,76.712) 51.465,76.712 v1(52.683,75.494)
NetC32_1: C32.1 R24.2 | length 2.2
  Top Layer w0.254: R24.2 40.283,79.819 40.383,79.719 C32.1@41.458,79.719
NetC32_2: C32.2 IC4.2 P2.1 P2.2 R26.2 | length 18.9
  Top Layer w0.254: P2.1 P2.1@33.788,89.209 ; C32.2@41.458,81.069 41.589,81.2 42.033,81.2 42.252,81.419 43.133,81.419 44.358,81.419 44.733,81.044 IC4.2
  Top Layer w0.6: P2.1@33.788,89.209 36.328,86.669 P2.2 39.133,84.344 41.35,82.127 C32.2
NetC36_1: C36.1 IC5.7 | length 2.3
  Top Layer w0.254: IC5.7 C36.1
NetC36_2: C36.2 IC5.6 L7.2 | length 2
  Top Layer w0.254: C36.2 82.325,100.025 82.375,99.975
NetC37_2: C37.2 C38.2 J10.1 J11.1 J12.1 L7.1 R29.2 Tp5.TP | length 53.3
  Top Layer w0.254: R29.2 70.539,100.075 v1(71.346,99.269)
  Top Layer w0.5: J12.1 Tp5.TP
  Bottom Layer w1: J10.1 57.725,74.5 57.725,79.675 J11.1 57.725,82.925 57.725,88.1 66.8,97.175 69.252,97.175 v1(71.346,99.269) 81.456,99.269 v1(82.675,98.05)
NetC39_1: C39.1 R30.2 | length 1.6
  Top Layer w0.254: R30.2 70,102.375 70.125,102.25 C39.1
NetC39_2: C39.2 IC5.2 R31.1 R32.2 | length 8
  Top Layer w0.254: R31.1 69.4,104.4 69.975,104.4 70.775,103.6 70.825,103.6 71.475,104.25 R32.2 72.9,104.25 73.55,103.6 IC5.2
NetIC1_1: IC1.1 R1.1 R4.2 | length 8
  Top Layer w0.254: IC1.1 72.402,70.85 73.427,69.825 75.525,69.825 75.75,69.6 R1.1 75.607,68.282 75.607,66.882 R4.2@75.35,66.625
NetIC2_1: IC2.1 R9.1 R10.2 | length 8
  Top Layer w0.254: IC2.1 52.552,104.752 53.127,105.327 53.127,107.425 53.802,108.1 R9.1 55.12,107.957 56.52,107.957 R10.2@56.777,107.7
NetIC3_1: IC3.1 R15.1 R16.2 | length 8.2
  Top Layer w0.254: R16.2 42.15,65.35 41.725,64.925 R15.1 41.75,63.425 41.75,62.275 41.975,62.05 44.073,62.05 45.098,61.025 IC3.1
NetIC4_1: IC4.1 R21.1 R22.2 | length 8.2
  Top Layer w0.254: R22.2 42.171,85.869 41.733,85.431 R21.1 41.758,83.944 41.758,82.794 41.983,82.569 44.081,82.569 45.106,81.544 IC4.1
NetIC5_1: IC5.1 R27.1 R28.2 | length 8.1
  Top Layer w0.254: R28.2 72.163,107.569 72.073,107.479 72.073,106.873 R27.1 71.725,105.449 71.874,105.3 73.7,105.3 74.9,104.1 IC5.1
NetP1_3: P1.3 R19.1 | length 7.6
  Top Layer w0.254: P1.3 37.365,63.61 39.25,61.725 R19.1
NetP2_3: P2.3 R25.1 | length 7.6
  Top Layer w0.6: P2.3 37.373,84.129 39.258,82.244 R25.1
NetR5_1: R5.1 R6.1 R7.2 | length 6.5
  Top Layer w0.254: R6.1 81.05,72.575 81.375,72.25 81.375,71.925 R7.2@81.375,70.4 ; R6.1@80.15,72.625 80.125,72.6 80.125,74.65 80.35,74.875 R5.1
NetR11_1: R11.1 R12.1 R13.2 | length 5.4
  Top Layer w0.254: R11.1 48.602,112.775 48.902,112.475 R12.1 51.077,112.475 51.633,113.031 R13.2
NetR17_1: R17.1 R18.1 R19.2 | length 5.3
  Top Layer w0.254: R17.1 36.275,57.025 36.275,58.975 36.6,59.3 R18.1 R19.2
NetR23_1: R23.1 R24.1 R25.2 | length 5.3
  Top Layer w0.254: R23.1 36.308,79.519 36.608,79.819 R24.1 R25.2
NetR29_1: R29.1 R30.1 R31.2 | length 6.6
  Top Layer w0.254: R31.2 67.05,104.7 67.35,104.4 R30.1 66.6,102.375 66.3,102.075 R29.1
PGND: C1.1 C2.1 C3.1 C5.1 C6.1 C7.1 C9.1 C10.1 C11.1 C12.1 C14.1 C15.1 C16.1 C18.1 C19.1 C20.1 C21.1 C23.1 C24.1 C26.1 C27.1 C28.1 C30.1 C31.1 C33.1 C34.1 C35.1 C37.1 C38.1 C40.1 C41.1 C42.1 C43.1 C44.1 C45.1 C46.1 C47.1 C48.1 CS1.2 D1.2 D2.2 D3.2 D4.2 D5.2 IC1.9 IC2.9 IC3.9 IC4.9 IC5.9 J1.N J2.2 J3.2 J4.2 J5.2 J6.2 J7.2 J8.2 J9.2 J10.2 J11.2 J12.2 J13.2 J14.2 J15.P J16.P J17.2 J18.2 NT1.2 NT2.2 NT3.2 NT4.2 NT5.2 pad.7 Tp6.TP Tp10.TP Tp11.TP | length 4.7
  Top Layer w0.15: 81.975,78.325 82,78.35
  Top Layer w0.254: 77.85,89.475 77.925,89.4 J3.2
VCC: C1.2 C2.2 C3.2 C10.2 C11.2 C12.2 C19.2 C20.2 C21.2 C26.2 C27.2 C28.2 C33.2 C34.2 C35.2 C40.2 C41.2 C42.2 C43.2 C44.2 C45.2 C46.2 C47.2 C48.2 CS1.1 D1.1 D4.1 D5.1 IC1.8 IC1.11 IC1.12 IC1.13 IC2.8 IC2.11 IC2.12 IC2.13 IC3.8 IC3.11 IC3.12 IC3.13 IC4.8 IC4.11 IC4.12 IC4.13 IC5.8 IC5.11 IC5.12 IC5.13 J1.P J13.1 J14.1 J15.N J16.N J17.1 J18.1 R1.2 R9.2 R15.2 R21.2 R27.2 Tp7.TP | length 42.6
  Top Layer w0.254: R15.2 43.725,63.2 44.637,62.288 45.257,62.288 v1(45.452,62.094) ; R21.2 43.733,83.719 44.645,82.807 45.266,82.807 v1(45.46,82.612) ; v1(53.621,104.398) 53.815,104.593 53.815,105.188 54.727,106.1 R9.2 ; J1.P J1.P@58.55,50 ; v1(72.048,69.781) 72.243,69.587 72.838,69.587 73.75,68.675 R1.2 ; R27.2 73.725,106.275 74.637,105.363 75.257,105.363 v1(75.452,105.169)
  Bottom Layer w0.254: v1(45.452,62.094) 47.045,60.5 v1(52.75,60.5) ; v1(45.46,82.612) 48.388,82.612 48.5,82.5 ; v1(52.25,97.25) 52.25,103.028 v1(53.621,104.398) ; v1(64.825,71.3) 70.53,71.3 v1(72.048,69.781) ; v1(75.452,105.169) 79.169,105.169 79.25,105.25
  other v1: 65,56.5 65,58.25 65,60 65,61.75 52.75,62.25 65,63.5 52.75,64 52.75,65.75 52.75,67.5 52.75,69.25 52.75,71 52.75,81 52.75,82.75 52.75,84.5 52.75,86.25 52.75,88 52.75,89.75 52.75,91.5 54,97.25 55.75,97.25 57.5,97.25 59.25,97.25 61,97.25 62.75,97.25 84,103.75 84,105.5 84,107.25 84,109 84,110.75 84,112.5
pads on no net: IC1.4 IC1.5 IC2.4 IC2.5 IC3.4 IC3.5 IC4.4 IC4.5 IC5.4 IC5.5 J1.S1 J1.S2 J15.S1 J15.S2 J16.S1 J16.S2

## Polygon pours and split planes (outlines as drawn)
PGND on Top Layer "Top Layer-PGND" (solid, pour order 119): 159 vertices, not listed, extent 19.368,37.25 84.9,115.85
NetC7_2 on Top Layer "Top Layer-NetC7_2" (solid, pour order 38): 71.45,83.675 71.45,94.3 ccw(c70.7,94.3) 70.7,95.05 64.9,95.05 ccw(c64.9,94.2) 64.05,94.2 64.05,87.075 64.05,84.2 ccw(c64.575,84.2) 64.575,83.675
VCC on Top Layer "VCC_L01_P006" (solid, pour order 6): 43.125,43.1 46.05,43.1 ccw(c46.05,43.9) 46.85,43.9 46.85,45.276 ccw(c45.041,45.276) 46.32,46.555 43.5,49.375 43.5,54.775 42.05,54.775 42.05,44.175 ccw(c43.125,44.175)
VCC on Top Layer "VCC_L01_P015" (solid, pour order 15): 56.981,48.531 62.875,48.531 62.875,55.95 59.625,55.95 59.625,51.506 56.981,51.506
NetC13_2 on Top Layer "Top Layer-NetC13_2" (solid, pour order 118): 44.011,94.464 ccw(c45.075,94.464) 45.075,93.4 47.325,93.4 ccw(c47.325,94.436) 48.361,94.436 48.361,101.856 51.804,101.856 51.804,102.106 51.111,102.106 50.686,102.531 48.35,102.531 48.35,103.3 ccw(c47.825,103.3) 47.825,103.825 44.525,103.825 ccw(c44.525,103.325) 44.025,103.325 44.025,102.531 44.011,102.531
VCC on Top Layer "VCC_L01_P098" (solid, pour order 98): 77.366,52.825 80.475,52.825 80.475,43.025 71.425,43.025 cw(c71.425,44.425) 70.025,44.425 70.025,45.401 cw(c73.824,45.401) 71.138,48.088 74.821,51.771 cw(c77.366,49.226)
VCC on Top Layer "VCC_L01_P097" (solid, pour order 97): 30.325,43.2 30.325,48.55 ccw(c29.575,48.55) 29.575,49.3 28.025,49.3 ccw(c28.025,48.475) 27.2,48.475 27.2,47.1 26.775,46.675 25.4,46.675 24.775,46.05 20.775,46.05 ccw(c20.775,45.475) 20.2,45.475 20.2,43.95 ccw(c20.95,43.95) 20.95,43.2
NetC16_2 on Top Layer "NETC16_2_L01_P029" (solid, pour order 29): 28.995,103.081 28.995,94.953 cw(c27.979,94.953) 27.979,93.937 20.283,93.937 cw(c20.283,94.852) 19.368,94.852 19.368,102.878 cw(c20.283,102.878) 20.283,103.793 28.284,103.793 cw(c28.284,103.081)
VCC on Top Layer "VCC_L01_P111" (solid, pour order 111): 48.25,59.775 48.25,71.825 cw(c48.85,71.825) 48.85,72.425 52.575,72.425 cw(c52.575,71.525) 53.475,71.525 53.475,59.775
NetC37_2 on Top Layer "Top Layer-NetC37_2" (solid, pour order 77): 76.75,95.8 84.55,95.8 ccw(c84.55,96.275) 85.025,96.275 85.025,98.35 ccw(c84.55,98.35) 84.55,98.825 77.375,98.825 77.375,100.9 ccw(c76.925,100.9) 76.925,101.35 76.5,101.35 ccw(c76.5,100.875) 76.025,100.875 76.025,96.525 ccw(c76.75,96.525)
NetC36_2 on Top Layer "NETC36_2_L01_P073" (solid, pour order 73): 78,103.35 78,101.025 84.55,101.025 cw(c84.55,100.55) 85.025,100.55 85.025,99.55 cw(c84.575,99.55) 84.575,99.1 77.625,99.1 77.625,102.3 77.75,102.425 77.75,103.35
VCC on Top Layer "VCC_L01_P116" (solid, pour order 116): 64.85,72.1 69.25,72.1 69.25,56.575 cw(c68.4,56.575) 68.4,55.725 64.825,55.725 cw(c64.825,56.525) 64.025,56.525 64.025,71.275 cw(c64.85,71.275)
VCC on Top Layer "VCC_L01_P052" (solid, pour order 52): 78.25,103.125 78.25,114.975 cw(c79.125,114.975) 79.125,115.85 84.2,115.85 cw(c84.2,115.05) 85,115.05 85,103.675 cw(c84.175,103.675) 84.175,102.85 78.525,102.85 cw(c78.525,103.125)
VCC on Top Layer "VCC_L01_P045" (solid, pour order 45): 48.258,80.569 48.258,92.183 cw(c49.036,92.183) 49.036,92.961 52.589,92.961 cw(c52.589,92.067) 53.483,92.067 53.483,80.944 cw(c52.833,80.944) 52.833,80.294 48.533,80.294 cw(c48.533,80.569)
NetC29_2 on Top Layer "NETC29_2_L01_P050" (solid, pour order 50): 48.008,80.794 48.008,78.469 52.833,78.469 cw(c52.833,77.819) 53.483,77.819 53.483,77.144 cw(c52.883,77.144) 52.883,76.544 47.633,76.544 47.633,79.744 47.758,79.869 47.758,80.794
NetC30_2 on Top Layer "Top Layer-NetC30_2" (solid, pour order 51): 46.758,73.244 53.458,73.244 53.458,75.644 ccw(c52.834,75.644) 52.833,76.269 47.383,76.269 47.383,78.344 ccw(c46.933,78.344) 46.933,78.794 46.508,78.794 ccw(c46.508,78.319) 46.033,78.319 46.033,73.969 ccw(c46.758,73.969)
NetC4_2 on Top Layer "NETC4_2_L01_P021" (solid, pour order 21): 69.5,71.6 69.5,73.925 64.675,73.925 cw(c64.675,74.575) 64.025,74.575 64.025,75.2 cw(c64.675,75.2) 64.675,75.85 69.875,75.85 69.875,72.65 69.75,72.525 69.75,71.6
NetC5_2 on Top Layer "Top Layer-NetC5_2" (solid, pour order 36): 71.475,82.4 64.6,82.4 ccw(c64.6,81.85) 64.05,81.85 64.05,76.75 ccw(c64.675,76.75) 64.675,76.125 70.125,76.125 70.125,74.05 ccw(c70.575,74.05) 70.575,73.6 71,73.6 ccw(c71,74.075) 71.475,74.075
VCC on Top Layer "VCC_L01_P022" (solid, pour order 22): 51.577,101.6 63.167,101.6 cw(c63.167,100.956) 63.811,100.956 63.811,97.081 cw(c63.106,97.081) 63.106,96.375 51.952,96.375 cw(c51.952,97.025) 51.302,97.025 51.302,101.325 cw(c51.577,101.325)
NetC14_2 on Top Layer "NETC14_2_L01_P026" (solid, pour order 26): 38.215,103.005 38.215,94.75 cw(c37.402,94.75) 37.402,93.937 30.305,93.937 cw(c30.305,94.79) 29.452,94.79 29.452,103.132 cw(c30.113,103.132) 30.113,103.793 37.428,103.793 cw(c37.428,103.005)
NetC22_2 on Top Layer "NETC22_2_L01_P043" (solid, pour order 43): 48,60.275 48,57.95 52.825,57.95 cw(c52.825,57.3) 53.475,57.3 53.475,56.625 cw(c52.875,56.625) 52.875,56.025 48.25,56.025 cw(c48.25,56.65) 47.625,56.65 47.625,59.225 47.75,59.35 47.75,60.275
NetC23_2 on Top Layer "Top Layer-NetC23_2" (solid, pour order 44): 46.75,52.725 52.85,52.725 ccw(c52.85,53.325) 53.45,53.325 53.45,55.125 ccw(c52.825,55.125) 52.825,55.75 47.375,55.75 47.375,57.825 ccw(c46.925,57.825) 46.925,58.275 46.5,58.275 ccw(c46.5,57.8) 46.025,57.8 46.025,53.45 ccw(c46.75,53.45)
NetC7_2 on Bottom Layer "NETC7_2_L02_P120" (solid, pour order 120): 66.098,94.1 84.5,94.1 84.7,93.9 84.7,91.05 80.217,91.05 74,84.833 74,82.95 ccw(c74.95,82.95) 74.95,82 78.728,82 cw(c78.728,80.978) 79.75,80.978 79.75,79.052 cw(c78.798,79.052) 78.798,78.1 65.5,78.1 cw(c65.5,79.35) 64.25,79.35 64.25,93.125 cw(c65.225,93.125) 65.225,94.1
VCC on Bottom Layer "Bottom Layer-VCC" (solid, pour order 113): 20.275,37.25 84.125,37.25 ccw(c84.125,37.975) 84.85,37.975 84.85,63.525 79.125,63.525 79.125,53.1 cw(c78.1,53.1) 78.1,52.075 70.025,52.075 cw(c70.025,52.862) 69.238,52.862 69.238,71.187 ccw(c68.225,71.187) 68.225,72.2 62.775,72.2 ccw(c62.775,71.1) 61.675,71.1 61.675,68 55.963,68 55.963,92.213 60,96.25 63.273,96.25 ccw(c63.273,96.977) 64,96.977 64,104.37 cw(c67.934,104.37) 65.152,107.152 68.549,110.549 cw(c70.902,108.196) 70.902,111.524 76.651,111.524 cw(c76.652,109.925) 78.25,109.925 78.25,103.125 ccw(c78.516,103.125) 78.516,102.859 84.526,102.859 ccw(c84.526,103.333) 85,103.333 85,115.381 ccw(c84.531,115.381) 84.531,115.85 60.95,115.85 ccw(c60.95,114.773) 59.873,114.773 59.873,103.198 cw(c58.531,103.198) 58.531,101.856 49.281,101.856 ccw(c49.28,100.75) 48.175,100.75 48.175,92.925 48.238,92.925 48.238,62.262 ccw(c49.25,62.262) 49.25,61.25 53.175,61.25 cw(c53.175,60.637) 53.788,60.637 53.788,52.774 cw(c53.09,52.773) 53.09,52.075 20.05,52.075 ccw(c20.05,51.4) 19.375,51.4 19.375,38.15 ccw(c20.275,38.15)
NetC16_2 on Bottom Layer "Bottom Layer-NetC16_2" (solid, pour order 114): 30.52,93.95 43.714,107.144 43.714,109.111 ccw(c42.568,109.111) 42.568,110.257 34.266,110.257 32.217,110.257 ccw(c32.216,107.691) 30.402,109.505 24.971,104.075 24.95,104.075 19.375,98.5 19.375,94.614 ccw(c20.039,94.614) 20.039,93.95

## Silkscreen, mask and mechanical layers (free items; w line width, h text height)
Top Overlay:
  drawing of 35 lines, arcs and shapes, not listed
  text "LIDAR" at 22.7,114.85 h0.75
  text "VALVE" at 44.875,114.825 h0.75
  text "PDB SOUTIEN V1" at 63.504,113.754 h0.8
  text "12V" at 24.125,113.55 h0.75
  text "1 fevrier 2026" at 63.504,112.004 h0.8
  text "BATATA" at 63.504,110.254 h0.8
  text "GND" at 24.7,109.7 h0.75
  text "5.1V" at 55.375,92.85 h0.75
  text "5.1V" at 76.4,92.175 h0.75 r90
  text "SPARE" at 76.45,87.05 h0.75 r90
  text "LIDAR" at 55.375,86.55 h0.75 r90
  text "4-8V" at 28.524,84.349 h0.75 r269.64
  text "PI" at 75.425,78.675 h0.75 r90
  text "R.S." at 55.375,78.5 h0.75 r90
  text "SERVOS" at 28.499,78.099 h0.75 r269.64
  text "SERVO DJI" at 55.25,68.45 h0.75 r90
  text "DJI" at 82.175,63.975 h0.75
  text "4-8V" at 28.4,63.875 h0.75 r270
  text "SERVOS" at 28.549,57.799 h0.75 r269.64
  text "SPARE" at 29.049,50.926 h0.75 r0.16
  text "LTE" at 21.725,50.3 h0.75 r359.9
  text "+" at 58.079,46.775 h1.52
  text "-" at 52.979,46.767 h1.52
  text "UBEC" at 37.781,43.681 h0.75 r90
  text "GIMBAL" at 65.625,43.45 h0.75 r90
  text "ANTENNE" at 77.05,43.175 h0.75 r90
  text "ALIM" at 50.475,42.125 h0.75 r90